# Altium PCB HFM_Power_Supply_V1.PcbDoc
Units mil, origin at the board's own origin, x right, y up, seen from the top; angles counter-clockwise.
Board outline 856 x 915 mil, 2 copper layers (Top Layer, Bottom Layer); 16 components, 11 nets, 43 pads, 24 vias.
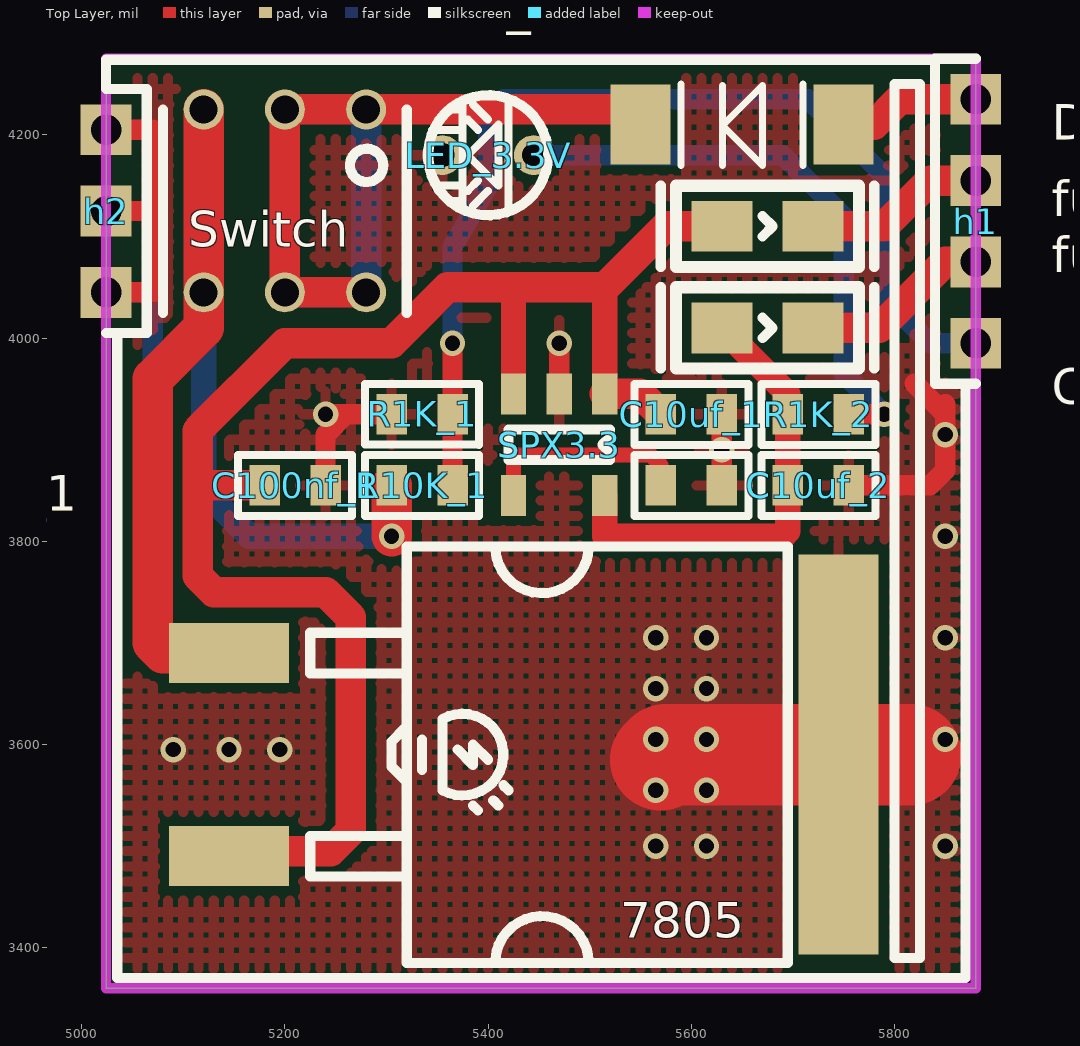
[diagram p0: Top Layer view]
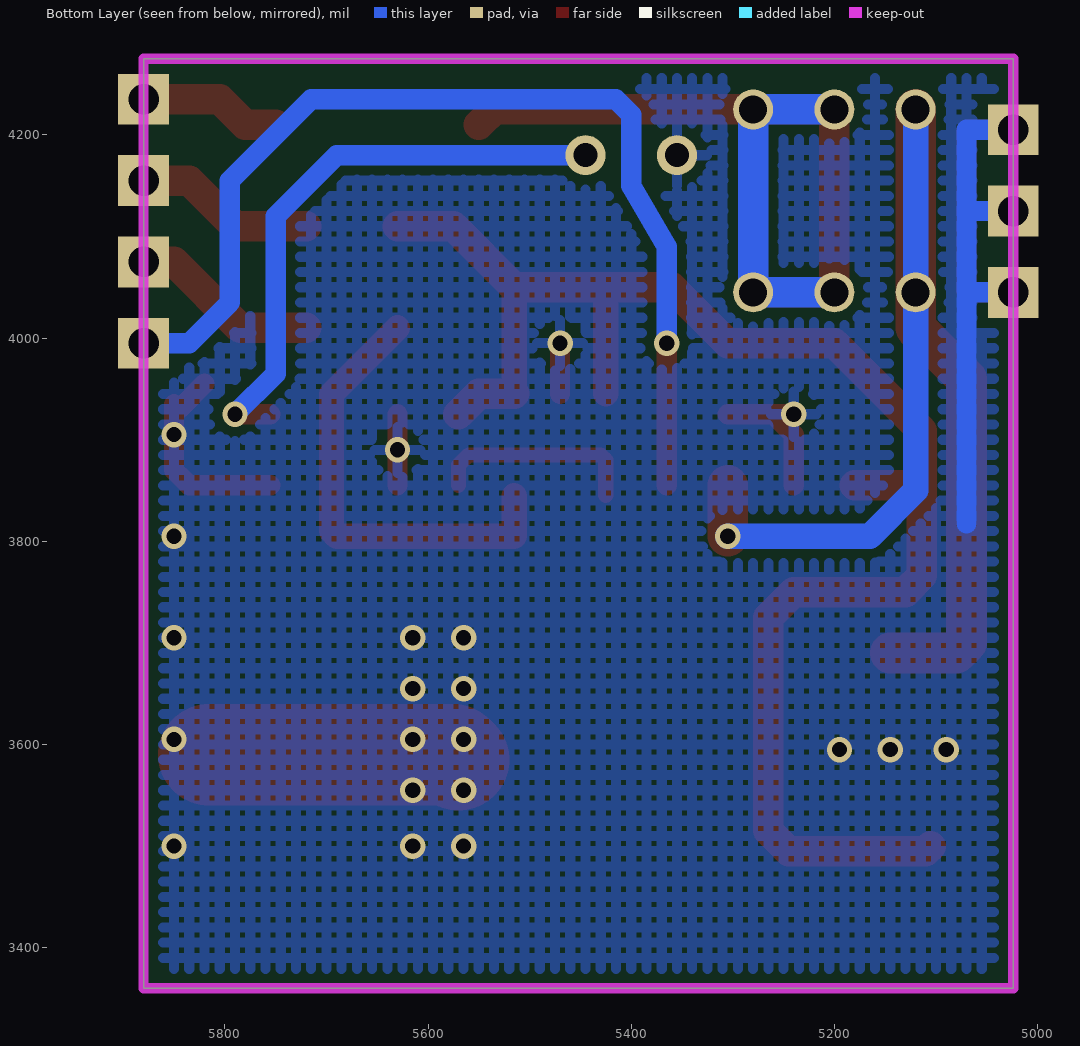
[diagram p1: Bottom Layer view, seen from below]

## Layer stack, top to bottom
Top Layer: signal copper 1.4
Dielectric: dielectric 12.6, FR-4, Dk 4.8
Bottom Layer: signal copper 1.4

## Board outline
5024,3360 5024,4275 5880,4275 5880,3360

## Design rules (kind name [scope] priority, off if disabled: settings)
Clearance [All] p1: gap=9
ComponentClearance [All] p1 off: gap=10 collisioncheckmode=3 verticalgap=10 showdistances=FALSE
Height [All] p1 off: minheight=0 maxheight=1000 prefheight=500
HoleToHoleClearance [All] p1: gap=6 allowstackedmicrovias=TRUE
MinimumSolderMaskSliver [All] p1: minsoldermaskwidth=0
PolygonConnect [All] p1: connectstyle=Relief reliefconductorwidth=10 reliefentries=4 polygonreliefangle="90 Angle"
RoutingVias [All] p1: holewidth=28 width=50 viastyle="Through Hole" minholewidth=10 minwidth=20 maxholewidth=50 maxwidth=50
SilkToSilkClearance [All] p1: silktosilkclearance=0
SilkscreenOverComponentPads SilkToSolderMaskClearance [IsPad] p1: minsilkscreentomaskgap=0
SolderMaskExpansion [All] p1: expansion=4
Width [All] p1: maxlimit=200 minlimit=10 preferedwidth=10
22 further rules are at their usual default settings.

## Components (designator, comment, footprint, x,y, rotation, side; value= is the part's Value field where it differs from the comment)
7805 "CHP_L7805CD2T-TR" CHP_TOD2PAK 5605,3700 r270 top
C10uf_1 "ELE_Cap_10uf" ELE_0603_P 5600,3925 r0 top
C10uf_2 "ELE_Cap_10uf" ELE_0603_P 5725,3855 r0 top
C100nf_1 "ELE_Cap_100nf" ELE_0603_P 5210,3855 r0 top
C100nf_2 "ELE_Cap_100nf" ELE_0603_P 5600,3855 r180 top
D1 "1N4148" ELE_D1206 5750,4310 r180 top
fuze1 "ELE_fuze_500mA_0805" ELE_FUZE_0805 5720,4110 r180 top
fuze2 "ELE_fuze_500mA_0805" ELE_FUZE_0805 5720,4010 r180 top
h1 "HDR_STAMPHOLE_1*4" HDR_STAMPHOLE_2.00_DH_1*4 5880,4235 r270 top
h2 "HDR_STAMPHOLE_1*3" HDR_STAMPHOLE_2.00_DH_1*3 5024,4045 r90 top
LED_3.3V "ELE_LED_DV" ELE_LED_DV 5450,4180 r180 top
R1K_1 "ELE_R1K" ELE_0603_P 5335,3925.04 r0 top
R1K_2 "ELE_R10K" ELE_0603_P 5725,3925 r180 top
R10K_1 "ELE_R10K" ELE_0603_P 5335,3855 r180 top
SPX3.3 "CHP_SPX3819M5-L-3.3" CHP_SOT23_P_5P 5510,3940 r270 top
Switch "ELE_自锁开关" ELE_自锁开关_DV_5.8*5.8 5280,4225 r180 top

## Footprints (in the part's own frame and the unit in brackets; to place one, negate y for a bottom-side part, rotate by r counter-clockwise, add the part's x,y. Pads: shape width x height; smd on the part's side, far side on the other; paste and mask are expansions set on the pad)
CHP_SOT23_P_5P [mil]
  rect 40x25 smd: 1(-5,5) 2(-5,-40) 3(-5,-85) 4(95,-85) 5(95,5)
  silkscreen extent 30,-90 60,10
CHP_TOD2PAK [mil]
  rect 59.06x118.11 smd: 1(10,-460) 2(210,-460)
  rect 393.7x78.74 smd: 3(110,140)
  silkscreen extent -95,-380 315,90
ELE_0603_P [mil]
  rect 30x40 smd: 1(-30,0) 2(30,0)
  silkscreen extent -56,-30 56,30
ELE_D1206 [mm]
  rect 1.5x2 smd: 1(0,2.54) 2(5.08,2.54)
  silkscreen extent 1.02,1.52 4.06,3.56
ELE_FUZE_0805 [mil]
  rect 60x50 smd: 1(0,0) 2(90,0)
  silkscreen extent -60,-40 150,40
ELE_LED_DV [mm] "Connector; Header; 2 Po"
  round 1 hole 0.6: 1(0.127,0) 2(2.413,0)
  silkscreen extent -0.23,-1.5 2.77,1.5
ELE_自锁开关_DV_5.8*5.8 [mm]
  round 1 hole 0.7: 1(0,4.572) 1(0,0) 1(2.032,4.572) 1(2.032,0) 2(4.064,4.572) 2(4.064,0)
  silkscreen extent -1.02,0 5.08,5.08
HDR_STAMPHOLE_2.00_DH_1*3 [mil]
  rect 50x50 hole 30: 1(0,0) 2(80,0) 3(160,0)
  Keep-Out Layer lines w10: -40,0 200,0
  silkscreen extent -40,-40 200,0
HDR_STAMPHOLE_2.00_DH_1*4 [mil]
  rect 50x50 hole 30: 1(0,0) 2(80,0) 3(160,0) 4(240,0)
  Keep-Out Layer lines w10: 280,0 -40,0
  silkscreen extent -40,-40 280,0

## Part data
7805: "5.0稳压"
C10uf_1 C10uf_2: "µçÈÝ10uf¹"
C100nf_1 C100nf_2: "µçÈÝ100nf¹"
D1: library part ELE_Diode, "二极"
LED_3.3V: "发光二极管 直插"
R1K_1: "µç×è1K¹"
R1K_2 R10K_1: "µç×è10K¹"
SPX3.3: "3.3VÎÈÑ"
Switch: library part ELE_×

## Via types
v1: diameter 25, hole 15, Top Layer to Bottom Layer, 24 vias

## Nets (pads, with @x,y where several pads share a name; then routed paths per layer and width w, separated by ;. In a path a pad name is that pad's centre, name@x,y a point inside that pad or via, vN(x,y) a via of type N, cw(c..) or ccw(c..) an arc to the next point about the centre after c; other vN are vias at no path point)
GND: 7805.3 C10uf_1.2 C10uf_2.2 C100nf_1.2 C100nf_2.1 h2.1 h2.2 h2.3 LED_3.3V.2 R1K_1.1 SPX3.3.2 | length 1500.4
  Top Layer w20: h2.1 5065,4045 ; h2.2 5070,4125 ; h2.3 5070,4205 5070,4125 ; 5070,4045 5070,4125 ; C100nf_1.2 5240,3905.04 5260,3925.04 ; v1(5240.04,3925.04) v1(5240.04,3925.04) 5260,3925.04 ; R1K_1.1 5260,3925.04 ; SPX3.3.2 v1(5470,3995) ; C100nf_2.1 C10uf_1.2 ; C10uf_2.2 5835,3855 5845,3865 ; 5820,3955 5845,3930 ; 5850,3870 5850,3935
  Top Layer w100: 5570,3585 5575,3590 7805.3 5816,3590
  Bottom Layer w20: h2.2 5070,4125 ; h2.3 5070,4205 5070,4125 ; h2.1@5048,4045 5070,4045 ; 5070,3817.5 5070,4045 ; 5070,4045 5070,4125
  other v1: 5565,3500 5615,3500 5850,3500 5565,3555 5615,3555 5090,3595 5145,3595 5195,3595 5565,3605 5615,3605 5850,3605 5565,3655 5615,3655 5565,3705 5615,3705 5850,3705 5850,3805 5630,3890 5850,3905
NetC100nf_2_2: C100nf_2.2 SPX3.3.4 | length 206.2
  Top Layer w15: SPX3.3.4 5425,3880 5430,3885 5560,3885 5570,3875 C100nf_2.2
NetD1_2: D1.2 Switch.1 | length 956.2
  Top Layer w30: Switch.1@5280,4045 5200,4045 5200,4225 5280,4225 5535,4225 D1.2
  Bottom Layer w30: Switch.1@5200,4045 5280,4045 5280,4225 Switch.1@5200,4225
Netfuze1_1: fuze1.1 h1.2 | length 178.6
  Top Layer w30: fuze1.1 5790,4110 5835,4155 h1.2
Netfuze2_1: fuze2.1 h1.3 | length 186.9
  Top Layer w30: fuze2.1 5785,4010 5850,4075 h1.3
Neth1_4: h1.4 R1K_1.2 R10K_1.1 | length 1001.4
  Top Layer w20: R10K_1.1 R1K_1.2 v1(5365,3995)
  Bottom Layer w20: v1@5365,4000 5365,4090 5400,4150 5400,4220 5415,4235 5715,4235 5795,4155 5795,4035 5835,3995 h1.4@5856,3995
NetLED_3.3V_1: LED_3.3V.1 R1K_2.1 | length 576.4
  Top Layer w20: R1K_2.1 v1(5790,3925)
  Bottom Layer w20: LED_3.3V.1 5690,4180 5750,4120 5750,3965 v1(5790,3925)
VC_ADC: 7805.1 R10K_1.2 Switch.2 | length 1253.5
  Top Layer w40: Switch.2@5120,4225 5120,4045 5120,4010 5070,3960 5070,3700 5080,3690 7805.1 ; v1(5305,3805) R10K_1.2
  Bottom Layer w25: Switch.2@5120,4225 5120,4045 5120,3850 5165,3805 v1(5305,3805)
VCC3.3: C10uf_2.1 fuze2.2 R1K_2.2 SPX3.3.5 | length 449
  Top Layer w25: SPX3.3.5 5515,3805 5690,3805 5695,3810 R1K_2.2 5695,3945 fuze2.2
VCC5.0: 7805.2 C10uf_1.1 C100nf_1.1 fuze1.2 SPX3.3.1 SPX3.3.3 | length 1629.9
  Top Layer w25: SPX3.3.3 5425,4050 ; SPX3.3.1 5515,4050
  Top Layer w30: 7805.2@5105,3500 5110,3495 5245,3495 5265,3515 5265,3725 5240,3750 5130,3750 5114,3766 5114,3909 5200,3995 5305,3995 5360,4050 5425,4050 5515,4050 5575,4110 fuze1.2 ; 5114,3855 C100nf_1.1 ; SPX3.3.1 5550,3945 C10uf_1.1
VCC_IN: D1.1 h1.1 | length 140.4
  Top Layer w30: D1.1 5780,4210 5805,4235 h1.1

## Polygon pours and split planes (outlines as drawn)
GND on Top Layer "Top Layer-No Net" (hatched 90Degree grid 15 track 10, remove dead copper, pour order 5): 4882.1,4523.86 4882.1,3168.02 5352.1,3168.02 5987.1,3168.02 5987.1,4542.69
GND on Bottom Layer "Top Layer-No Net" (hatched 90Degree grid 15 track 10, remove dead copper, pour order 7): 4806.5,3015.22 4806.5,4455.22 6099.39,4455.22 6038.97,4455.22 6038.97,3027.85

## Keep-outs
Keep-Out Layer:
  the board outline again, w10

## Silkscreen, mask and mechanical layers (free items; w line width, h text height)
Top Overlay:
  lines w10: 5024,4245 5024,4274 5840,4274 ; 5035,4005 5035,3370 5870,3370 5870,3955 ; 5335,3575 5335,3605 ; 5370,3595 5385,3580 5385,3600 5400,3585 ; 5385,3540 5390,3535 ; 5405,3545 5410,3540 ; 5415,3560 5420,3555 ; 5355,3555 ccw(c5374.79,3590) 5355,3625 5355,3555 ; 5800,3390 5800,4250 5825,4250 5825,3390 5800,3390

## Dimensions
5024,4275 to 5880,4275 on Top Overlay
5024,4275 to 5024,3360 on Top Overlay